# Altium PCB PCB1.PcbDoc (part 12 of 12)
Units mm, origin at the board's own origin, x right, y up, seen from the top; angles counter-clockwise.
Board outline 100 x 100 mm, 6 copper layers (Top Layer, Int1 (GND), Int2 (Sign), Int3 (Sign), Int4 (PWR), Bottom Layer), stack 1.538 mm thick; 614 components, 712 nets, 3014 pads, 1096 vias.
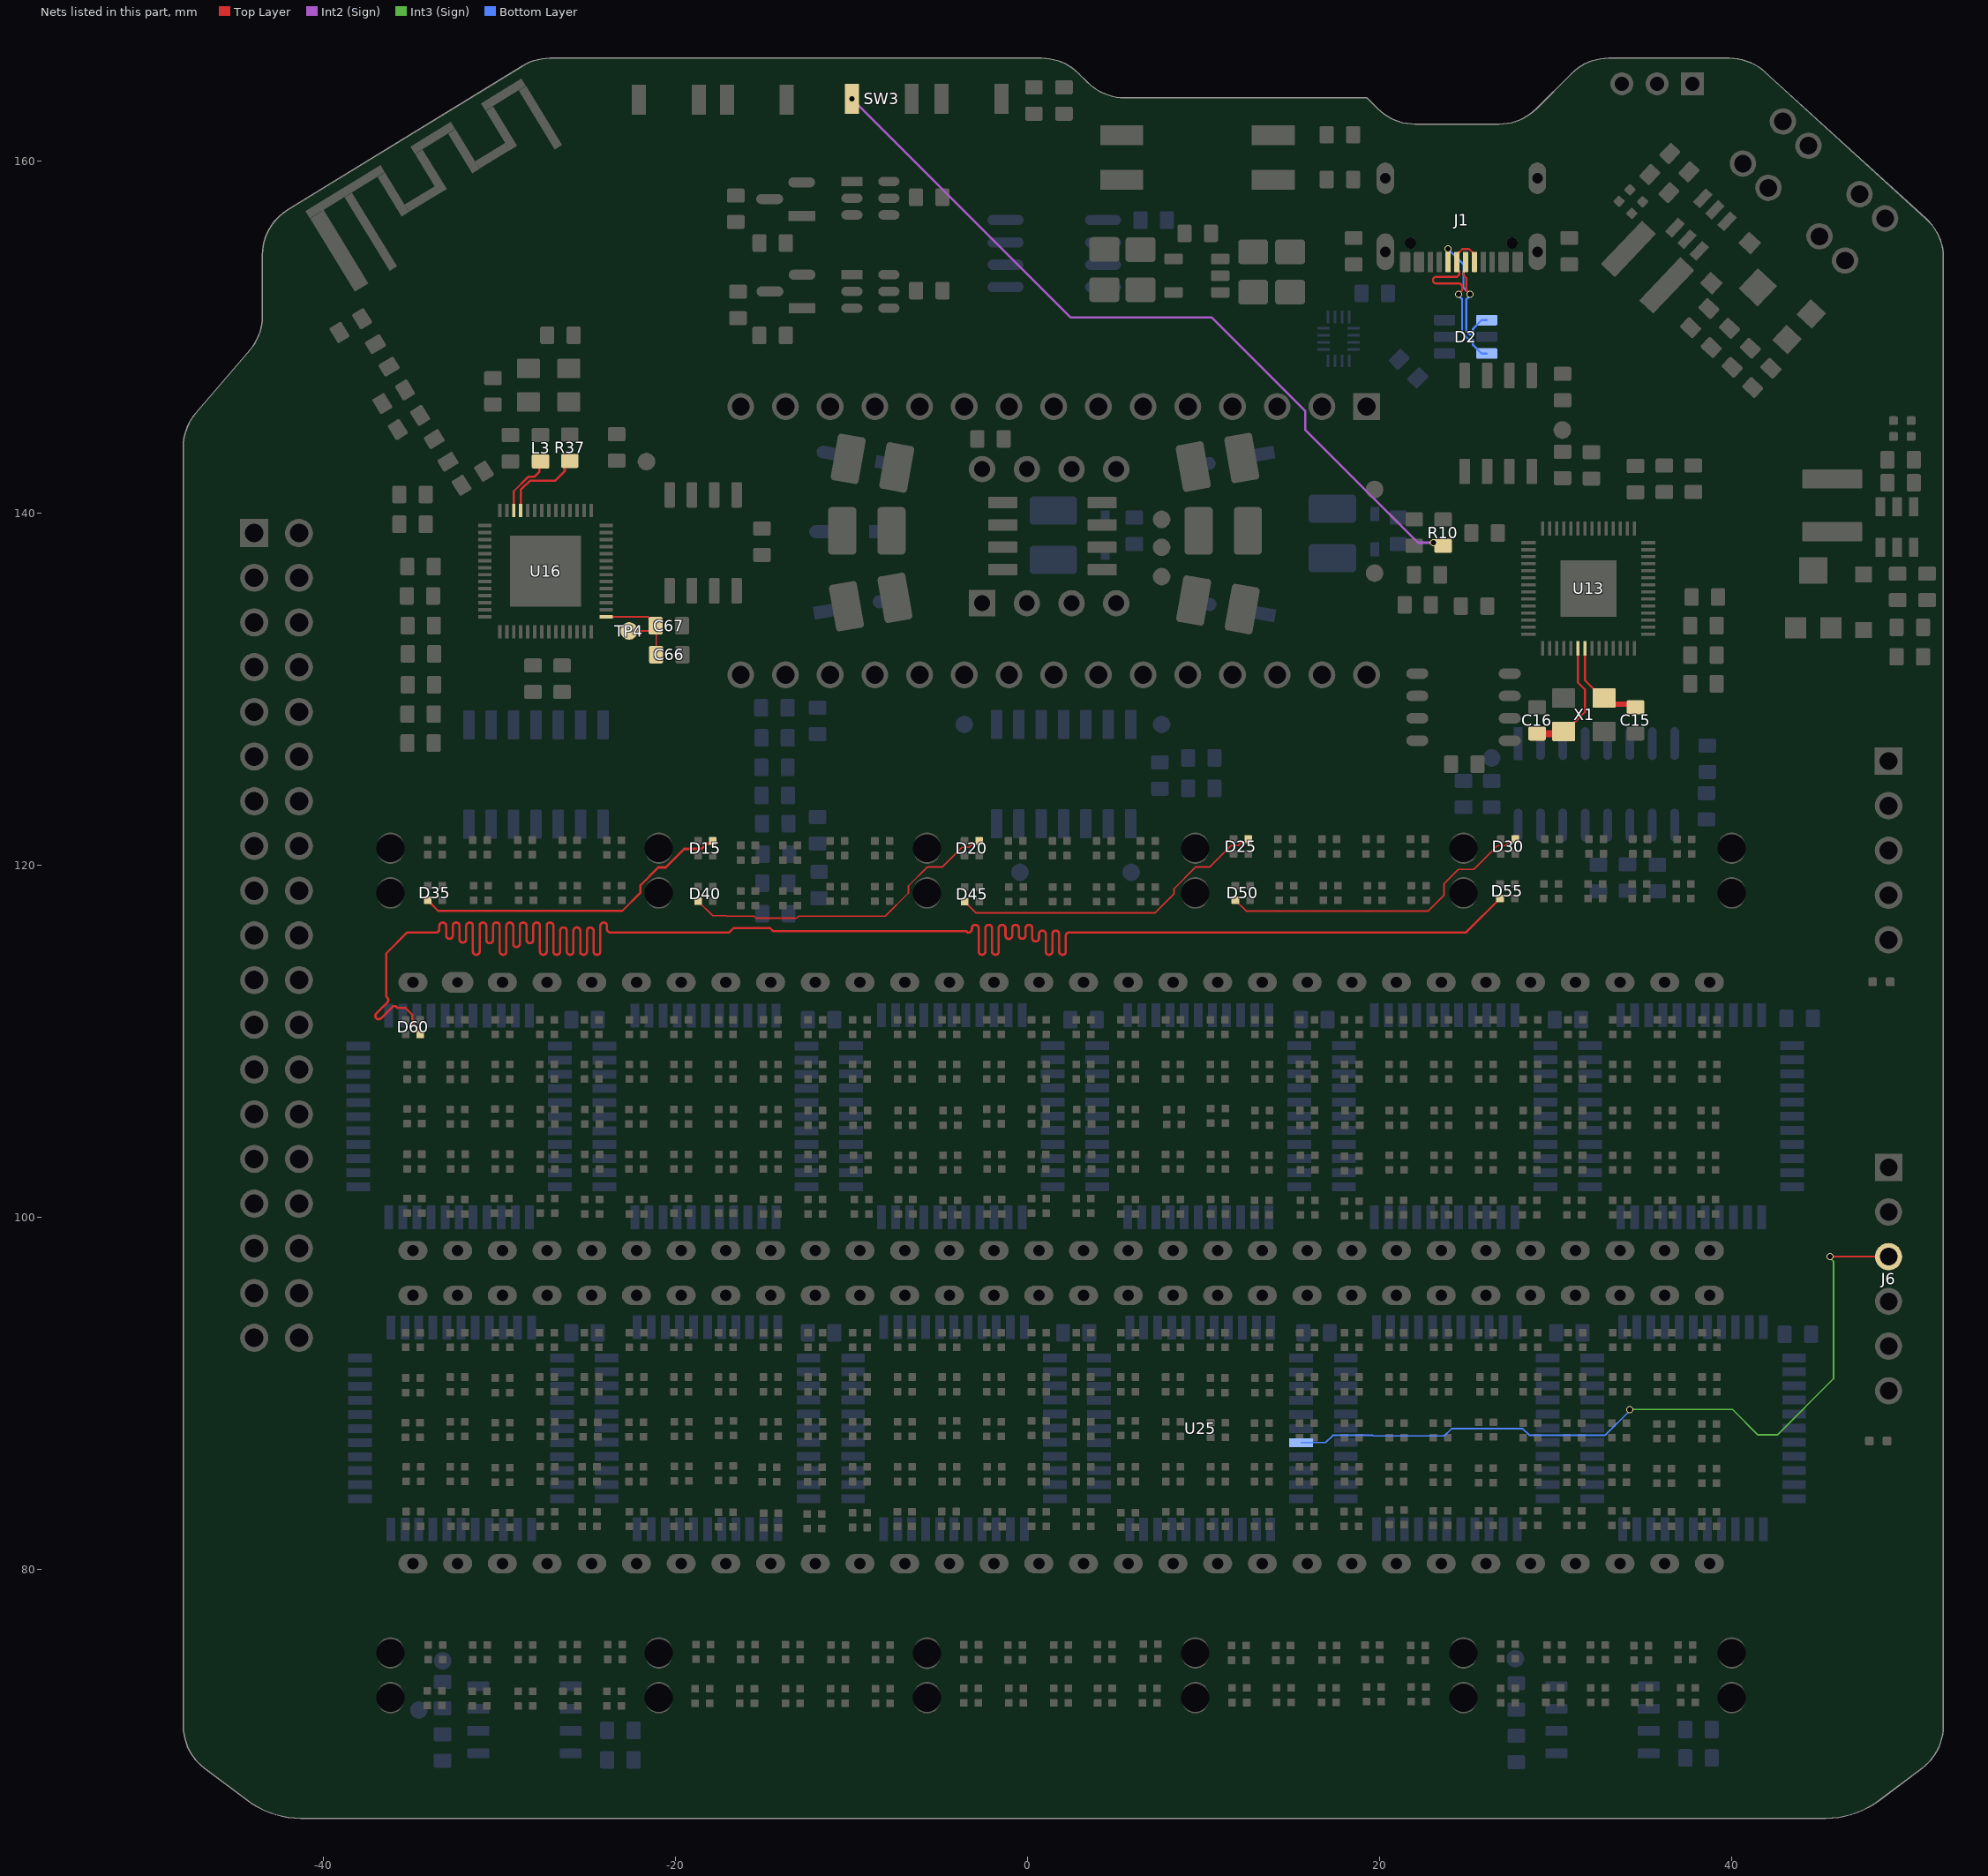
[diagram p15: the nets of this part, all layers, seen from the top]

## Via types
v1: diameter 0.4, hole 0.3, Top Layer to Bottom Layer, tented both sides, 1087 vias
v2: diameter 0.4, hole 0.3, Top Layer to Bottom Layer, 6 vias
v3: diameter 0.4, hole 0.3, Top Layer to Bottom Layer, tented top, 2 vias
v4: diameter 0.6, hole 0.5, Top Layer to Bottom Layer, 1 vias

## Nets (pads, with @x,y where several pads share a name; then routed paths per layer and width w, separated by ;. In a path a pad name is that pad's centre, name@x,y a point inside that pad or via, vN(x,y) a via of type N, cw(c..) or ccw(c..) an arc to the next point about the centre after c; other vN are vias at no path point) (continued)
SQUARE_WAV_1: J6.3 U25.7 | length 43.7
  Top Layer w0.09: v1(45.581,97.77) J6.3@48.905,97.77
  Int3 (Sign) w0.09: v1(34.202,89.089) 40.041,89.089 41.486,87.643 42.585,87.643 45.78,90.838 45.78,97.495 45.581,97.694 v1(45.581,97.77)
  Bottom Layer w0.09: U25.7@15.525,87.208 16.925,87.208 17.335,87.618 19.59,87.618 19.62,87.589 23.665,87.589 24.074,87.998 28.12,87.998 28.49,87.628 32.805,87.628 34.202,89.025 v1(34.202,89.089)
TOP1_RGB_OUT_8: D15.4 D35.1 | length 18.3
  Top Layer w0.127: D35.1@-34.1,118.021 -33.495,117.415 -23.039,117.415 -22.008,118.446 -22.008,118.87 -20.993,119.885 -20.573,119.885 -19.519,120.939 -18.547,120.939 -18.246,121.239 -18.059,121.239 D15.4@-17.907,121.391
TOP2_RGB_OUT_8: D20.4 D40.1 | length 18.5
  Top Layer w0.09: D40.1@-18.737,117.971 -17.908,117.141 -17.109,117.141 -17.083,117.115 -15.557,117.115 -15.445,117.003 -13.136,117.003 -13.024,117.115 -8.097,117.115 -6.781,118.431 -6.781,118.831 -5.708,119.904 -4.87,119.904 -3.744,121.031 -3.341,121.031 -3.119,121.253 -2.857,121.253 -2.82,121.29 -2.82,121.338 D20.4@-2.767,121.391
TOP3_RGB_OUT_8: D25.4 D45.1 | length 18.3
  Top Layer w0.09: D45.1@-3.584,117.949 -2.937,117.302 7.215,117.302 8.31,118.397 8.31,118.682 9.532,119.904 10.319,119.904 11.546,121.131 11.949,121.131 12.171,121.353 12.385,121.353 D25.4@12.523,121.491
TOP4_RGB_OUT_8: D30.4 D50.1 | length 18.2
  Top Layer w0.09: D50.1@11.793,118.021 12.406,117.408 22.75,117.408 23.641,118.299 23.641,118.953 24.465,119.777 25.338,119.777 26.692,121.131 27.132,121.131 27.354,121.353 27.568,121.353 D30.4@27.705,121.491
TOP5_RGB_OUT_8: D55.1 D60.4 | length 120.1
  Top Layer w0.127: D60.4@-34.517,110.401 -34.669,110.552 -34.669,110.74 -34.969,111.04 -34.969,111.522 -35.347,111.9 -35.805,111.9 -35.85,111.945 ccw(c-35.985,111.81) -36.119,111.945 -36.748,111.316 cw(c-36.883,111.451) -37.017,111.316 cw(c-36.883,111.451) -37.017,111.586 -36.389,112.214 ccw(c-36.523,112.349) -36.389,112.484 -36.45,112.545 -36.45,113.685 -36.45,114.99 -35.25,116.19 -33.685,116.19 -33.622,116.19 ccw(c-33.622,116.381) -33.431,116.381 -33.431,116.564 cw(c-33.241,116.564) -33.05,116.564 -33.05,116.021 ccw(c-32.86,116.021) -32.669,116.021 -32.669,116.564 cw(c-32.479,116.564) -32.288,116.564 -32.288,115.802 ccw(c-32.098,115.802) -31.907,115.802 -31.907,116.564 cw(c-31.717,116.564) -31.526,116.564 -31.526,115.111 ccw(c-31.336,115.111) -31.145,115.111 -31.145,116.564 cw(c-30.955,116.564) -30.764,116.564 -30.764,115.766 ccw(c-30.574,115.766) -30.383,115.766 -30.383,116.564 cw(c-30.193,116.564) -30.002,116.564 -30.002,115.111 ccw(c-29.812,115.111) -29.621,115.111 -29.621,116.564 cw(c-29.431,116.564) -29.24,116.564 -29.24,115.552 ccw(c-29.05,115.552) -28.859,115.552 -28.859,116.564 cw(c-28.669,116.564) -28.478,116.564 -28.478,115.766 ccw(c-28.288,115.766) -28.097,115.766 -28.097,116.564 cw(c-27.907,116.564) -27.716,116.564 -27.716,115.111 ccw(c-27.526,115.111) -27.335,115.111 -27.335,116.564 cw(c-27.145,116.564) -26.954,116.564 -26.954,115.111 ccw(c-26.764,115.111) -26.573,115.111 -26.573,116.285 cw(c-26.383,116.285) -26.192,116.285 -26.192,115.111 ccw(c-26.002,115.111) -25.811,115.111 -25.811,116.29 cw(c-25.621,116.29) -25.43,116.29 -25.43,115.111 ccw(c-25.24,115.111) -25.049,115.111 -25.049,116.285 cw(c-24.859,116.285) -24.668,116.285 -24.668,115.111 ccw(c-24.478,115.111) -24.287,115.111 -24.287,116.564 cw(c-24.097,116.564) -23.906,116.564 -23.906,116.381 ccw(c-23.716,116.381) -23.716,116.19 -23.039,116.19 -16.962,116.19 -16.713,116.44 -14.644,116.44 -14.472,116.268 -3.505,116.268 -3.427,116.19 -3.364,116.19 ccw(c-3.364,116.381) -3.173,116.381 -3.173,116.435 cw(c-2.983,116.435) -2.792,116.435 -2.792,115.111 ccw(c-2.602,115.111) -2.411,115.111 -2.411,116.435 cw(c-2.221,116.435) -2.03,116.435 -2.03,115.111 ccw(c-1.84,115.111) -1.649,115.111 -1.649,116.435 cw(c-1.459,116.435) -1.268,116.435 -1.268,116.009 ccw(c-1.078,116.009) -0.887,116.009 -0.887,116.435 cw(c-0.697,116.435) -0.506,116.435 -0.506,116.021 ccw(c-0.316,116.021) -0.125,116.021 -0.125,116.435 cw(c0.065,116.435) 0.256,116.435 0.256,115.867 ccw(c0.446,115.867) 0.637,115.867 0.637,116.104 cw(c0.827,116.104) 1.018,116.104 1.018,115.111 ccw(c1.208,115.111) 1.399,115.111 1.399,116.104 cw(c1.589,116.104) 1.78,116.104 1.78,115.111 ccw(c1.97,115.111) 2.161,115.111 2.161,116 cw(c2.351,116) 2.351,116.19 3.168,116.19 24.904,116.19 D55.1@26.833,118.12
USB_1_N: D2.3 J1.A7 J1.B7 | length 11.2
  Top Layer w0.116: v2(24.471,152.445) 24.471,152.449 24.677,152.655 24.677,152.824 24.677,152.882 ccw(c24.492,152.882) 24.492,153.066 23.201,153.066 cw(c23.201,153.251) 23.201,153.436 24.324,153.436 ccw(c24.324,153.621) 24.509,153.621 24.509,153.732 24.381,153.86 24.381,154.147 J1.A7@24.381,154.285 24.473,154.377 24.473,154.804 24.687,155.018 25.074,155.018 25.188,154.904 ; 25.188,154.902 25.381,154.71 J1.B7@25.381,154.285
  Bottom Layer w0.116: v2(24.471,152.445) 24.471,152.375 24.676,152.17 24.676,150.261 25.032,149.905 25.229,149.905 25.297,149.837 25.297,149.563 25.781,149.079 D2.3@26.081,149.079
USB_1_P: D2.1 J1.A6 J1.B6 | length 10.4
  Top Layer w0.116: v1(23.881,155.018) J1.B6@23.881,154.285 23.973,154.193 J1.B6@23.973,153.767 ; J1.A6@24.881,154.285 24.881,153.86 24.752,153.732 24.752,153.537 24.919,153.369 24.919,152.655 25.125,152.449 v2(25.125,152.445)
  Bottom Layer w0.116: v1(23.881,155.018) 24.752,154.147 24.752,152.818 v2(25.125,152.445) 25.125,152.375 24.92,152.17 24.92,150.361 25.133,150.148 25.229,150.148 25.297,150.216 25.297,150.495 25.781,150.979 D2.1@26.081,150.979
USB_BOOT_5: R10.2 SW3.1 | length 44.7
  Top Layer w0.127: v1(-9.996,163.555) SW3.1@-9.995,163.556 ; v1(23.057,138.335) 23.419,138.335 R10.2@23.598,138.156
  Int2 (Sign) w0.127: v1(-9.996,163.555) 2.42,151.139 10.445,151.139 15.758,145.826 15.758,144.752 22.175,138.335 v1(23.057,138.335)
VDD_SPI_6: C66.2 C67.2 TP4.1 U16.29 | length 6.3
  Top Layer w0.09: U16.29@-23.952,134.118 -21.578,134.118 -21.148,133.688 C67.2@-21.148,133.617 -21.448,133.318 TP4.1@-22.652,133.318 ; C67.2@-21.148,133.616 -21.106,133.574 -21.106,131.989 C66.2@-21.122,131.973
X_IN_5: C16.2 U13.20 X1.3 | length 6.4
  Top Layer w0.127: X1.3@30.326,127.492 X1.3@30.446,127.612 ; X1.3@31.02,127.908 31.02,128.086 31.657,128.723 31.657,129.998 31.257,130.398 U13.20@31.257,132.331
  Top Layer w0.4: C16.2@28.936,127.492 X1.3@30.326,127.492
X_OUT_5: C15.2 U13.21 X1.1 | length 5.1
  Top Layer w0.127: U13.21@31.657,132.331 31.657,130.516 32.159,130.014 32.159,129.998 32.646,129.512 X1.1@32.746,129.512 X1.1@33.103,129.154 ; C15.2@34.387,129.154 C15.2@34.395,129.146
  Top Layer w0.3: X1.1@33.103,129.154 C15.2@34.387,129.154
XTAL_6_N: R37.2 U16.53 | length 4.8
  Top Layer w0.127: U16.53@-28.804,140.17 -28.804,140.908 -28.806,140.909 -28.806,141.333 -28.272,141.866 -26.843,141.866 -26.31,142.399 -26.31,142.693 R37.2@-26.022,142.982
XTAL_6_P: L3.1 U16.54 | length 3.6
  Top Layer w0.127: U16.54@-29.204,140.17 -29.204,141.255 -28.366,142.093 -28.019,142.093 -27.745,142.367 -27.745,142.89 L3.1@-27.686,142.95
pads on no net: *.1 B1.6 B2.6 D405.1 J1.A8 J1.B8 J1.MH U3.4 U4.7 U4.8 U4.9 U4.10 U4.16 U5.9 U5.22 U5.23 U5.32 U5.44 U6.9 U6.22 U6.23 U6.32 U6.44 U7.9 U7.22 U7.23 U7.32 U7.44 U8.9 U8.22 U8.23 U8.32 U8.44 U9.9 U9.22 U9.23 U9.32 U9.44 U10.9 U10.22 U10.23 U10.32 U10.44 U11.9 U11.22 U11.23 U11.32 U11.44 U12.9 U12.22 U12.23 U12.32 U12.44 U16.21 U16.22 U17.7 U21.1 U21.2 U21.7 U21.8 U21.9 U21.10 U21.15 U21.16 U23.9 U23.22 U23.23 U23.32 U23.44 U24.9 U24.22 U24.23 U24.32 U24.44 U25.9 U25.22 U25.23 U25.32 U25.44 U26.9 U26.22 U26.23 U26.32 U26.44 U27.7 U31.2 U31.12

## Polygon pours and split planes (outlines as drawn)
REF on Top Layer "NONET_L01_P010" (solid, remove dead copper, shelved, pour order 10): -54.941,140.805 -38.79,140.805 -38.79,123.705 53.355,123.705 53.355,62.175 -54.941,62.175
REF on Top Layer "NONET_L01_P009" (hatched 45Degree grid 0.4 track 0.203, remove dead copper, shelved, pour order 9): -42.615,167.455 53.43,167.965 54.12,167.275 54.12,123.665 -38.79,123.665 -38.79,140.845 -48.615,140.845 -48.615,167.68
REF on Bottom Layer "NONET_L06_P072" (solid, remove dead copper, shelved, pour order 72): -55.425,168.06 56.7,168.06 56.7,64.125 57.75,63.075 56.565,61.89 -54.63,61.89
REF on Int1 (GND) (split plane): 229 vertices, not listed, extent -47.472,66.375 51.507,165.354

## Keep-outs
Keep-Out Layer:
  lines w0.013: -47.895,71.068 ccw(c-44.895,71.068) -46.695,68.668 -44.228,66.818 ccw(c-41.228,70.818) -41.228,65.818 -40.395,65.818 45.438,65.818 ccw(c45.438,70.818) 48.438,66.818 50.905,68.668 ccw(c49.105,71.068) 52.105,71.068 52.105,130.812 52.105,145.812 52.105,154.485 ccw(c49.105,154.485) 51.124,156.704 41.963,165.038 ccw(c39.945,162.818) 39.945,165.818 33.098,165.818 ccw(c33.098,162.818) 30.976,164.94 28.984,162.947 cw(c26.862,165.068) 26.862,162.068 22.098,162.068 cw(c22.098,165.068) 19.976,162.947 19.355,163.568 5.598,163.568 cw(c5.598,166.568) 3.476,164.447 2.984,164.94 ccw(c0.862,162.818) 0.862,165.818 -27.049,165.818 ccw(c-27.049,162.818) -28.616,165.376 -41.963,157.196 ccw(c-40.395,154.638) -43.395,154.638 -43.395,151.178 cw(c-46.395,151.178) -44.117,149.226 -47.173,145.661 ccw(c-44.895,143.709) -47.895,143.709 -47.895,71.068

## Other copper
Top Layer:
  pour cut-out: -43.465,141.708 cw(c-43.465,143.219) -44.976,143.219 cw(c-43.465,143.219) -43.465,144.73 cw(c-43.465,143.219) -41.954,143.219 cw(c-43.465,143.219)
  region net BUCK1_VIN_11: 47.34,142.59 47.46,142.47 47.46,142.215 48.244,142.215 48.284,142.175 49.194,142.175 49.173,141.285 49.173,141.27 48.255,141.27 48.076,141.448 47.48,141.448 47.378,141.346 44.004,141.346 44.004,142.584 44.01,142.59
  region net BUCK1_3v3: 34.457,141.128 34.457,138.756 34.878,138.756 34.878,138.335 35.025,138.335 35.025,141.129
  region net BUCK1_3v3: 34.38,140.945 37.815,140.945 37.815,141.455 34.38,141.455
Multi-Layer:
  pour cut-out: -42.945,158.01 -33.795,163.791 cw(c-31.084,163.577) -32.85,165.645 -29.04,166.38 -25.065,160.155 -39.12,151.367

## Silkscreen, mask and mechanical layers (free items; w line width, h text height)
Top Overlay:
  drawing of 433 lines, arcs and shapes, not listed
  text "R_RST" at -5.314,160.199 h1.5
  text "E_BOOT" at -17.775,160.17 h1.5
  text "R_BOOT" at -11.47,160.183 h1.5
  text "E_RST" at -22.483,160.155 h1.5
  text "5v" at 32.1,159.87 h1.2 r316.5
  text "3v3" at 31.56,159.27 h1.2 r316.5
  text "PWR" at 0.875,158.832 h1.5 r90
  text "NC" at -7.932,147.741 h1.5 r90
  text "A7" at -5.435,147.752 h1.5 r90
  text "A6" at -2.916,147.755 h1.5 r90
  text "A5" at -0.382,147.748 h1.5 r90
  text "GND" at -13.115,147.721 h1.5 r90
  text "RST" at -10.484,147.724 h1.5 r90
  text "A2" at 7.32,147.731 h1.5 r90
  text "A1" at 9.883,147.733 h1.5 r90
  text "A0" at 12.351,147.727 h1.5 r90
  text "D13" at 19.656,147.733 h1.5 r90
  text "A4" at 2.194,147.71 h1.5 r90
  text "A3" at 4.74,147.71 h1.5 r90
  text "NC" at 17.421,147.699 h1.5 r90
  text "5v" at -15.577,147.682 h1.5 r90
  text "AREF" at 14.846,147.541 h1.5 r90
  text "3v3" at 46.605,144.975 h1.2
  text "+1v1" at 30.833,144.248 h1.8
  text "5v" at 46.59,144.045 h1.2
  text "CH_VDD" at 19.628,141.925 h1.2
  text "-8v" at 8.135,140.094 h1.8 r90
  text "+8v" at 16.043,136.071 h1.8
  text "D0" at -13.084,127.521 h1.5 r90
  text "RST" at -10.59,127.535 h1.5 r90
  text "GND" at -8.059,127.539 h1.5 r90
  text "D2" at -5.45,127.533 h1.5 r90
  text "D3" at -2.904,127.532 h1.5 r90
  text "D12" at 19.634,127.52 h1.5 r90
  text "D1" at -15.418,127.517 h1.5 r90
  text "D4" at -0.335,127.515 h1.5 r90
  text "D5" at 2.188,127.506 h1.5 r90
  text "D6" at 4.717,127.504 h1.5 r90
  text "D11" at 17.486,127.508 h1.5 r90
  text "D7" at 7.191,127.491 h1.5 r90
  text "D8" at 9.746,127.479 h1.5 r90
  text "D9" at 12.335,127.473 h1.5 r90
  text "D10" at 14.85,127.493 h1.5 r90
  text "+vcc" at 44.009,125.182 h1.5
  text "PROBE" at 43.959,122.617 h1
  text "GND" at 44.184,120.118 h1
  text "Tx" at 44.831,117.635 h1
  text "Rx" at 44.884,115.167 h1
  text "+vcc" at 44.105,102.133 h1.5
  text "GND" at 44.364,99.7 h1
  text "Swave" at 43.69,96.933 h1
  text "STwave" at 43.495,94.629 h1
  text "3Wave" at 43.615,92.08 h1
  text "5Wave" at 43.669,89.406 h1
Bottom Overlay:
  text "A" at -31.495,114.458 h1.8
  text "I" at -3.545,114.358 h1.8
  text "L" at 10.455,114.358 h1.8
  text "C" at 24.455,114.358 h1.8
  text "D" at 38.455,114.358 h1.8
  text "B" at -17.513,114.308 h1.8
  text "E" at -31.695,77.408 h1.8
  text "J" at -3.745,77.308 h1.8
  text "K" at 10.255,77.308 h1.8
  text "G" at 24.255,77.308 h1.8
  text "H" at 38.255,77.308 h1.8
  text "F" at -17.713,77.258 h1.8
  text "ISENSE - 1" at 35.351,67.362 h0.8
  text "ISENSE - 2" at -25.095,67.058 h0.8
Top Solder:
  region: -26.09,148.752 -26.09,148.755 -26.084,148.755 -26.084,148.752 -26.087,148.752
  region: -26.071,149.247 -26.071,149.241 -26.078,149.241 -26.078,149.25 -26.075,149.25 -26.075,149.247
  region: -26.075,149.031 -26.075,149.034 -26.068,149.034 -26.068,149.025 -26.071,149.025 -26.071,149.028 -26.075,149.028
  region: -26.09,149.111 -26.087,149.111 -26.087,149.107 -26.09,149.107
  region: -26.084,148.723 -26.087,148.723 -26.087,148.726 -26.084,148.726
  region: -26.087,149.295 -26.087,149.298 -26.084,149.298 -26.084,149.295
  region: -26.068,148.85 -26.068,148.847 -26.075,148.847 -26.075,148.85 -26.071,148.85
  region: -26.078,149.184 -26.081,149.184 -26.081,149.187 -26.078,149.187
  region: -26.075,149.282 -26.075,149.276 -26.078,149.276 -26.078,149.282
  region: -26.071,148.678 -26.071,148.675 -26.078,148.675 -26.078,148.678 -26.081,148.678 -26.081,148.682 -26.071,148.682
  region: -26.065,149.171 -26.065,149.165 -26.075,149.165 -26.075,149.171 -26.068,149.171
  region: -26.081,148.818 -26.081,148.821 -26.075,148.821 -26.075,148.818 -26.078,148.818
  region: -26.084,148.958 -26.081,148.958 -26.081,148.961 -26.078,148.961 -26.078,148.958 -26.075,148.958 -26.075,148.949 -26.081,148.949 -26.081,148.952 -26.087,148.952 -26.087,148.958
  region: -26.075,148.91 -26.071,148.91 -26.071,148.907 -26.075,148.907 -26.075,148.895 -26.078,148.895 -26.078,148.898 -26.081,148.898 -26.081,148.91 -26.078,148.91 -26.078,148.914 -26.075,148.914
Top Courtyard:
  lines w0.013: -47.887,71.056 ccw(c-44.887,71.056) -46.687,68.656 ; -47.887,71.056 ccw(c-44.887,71.056) -46.687,68.656 ; -47.887,71.056 -47.887,143.697 ; -47.887,71.056 -47.887,143.697 ; -47.887,143.697 cw(c-44.887,143.697) -47.165,145.649 ; -47.887,143.697 cw(c-44.887,143.697) -47.165,145.649 ; -47.165,145.649 -44.109,149.214 ; -47.165,145.649 -44.109,149.214 ; -46.687,68.656 -44.22,66.806 ; -46.687,68.656 -44.22,66.806 ; -44.22,66.806 ccw(c-41.22,70.806) -41.22,65.806 ; -44.22,66.806 ccw(c-41.22,70.806) -41.22,65.806 ; -44.109,149.214 ccw(c-46.387,151.166) -43.387,151.166 ; -44.109,149.214 ccw(c-46.387,151.166) -43.387,151.166 ; -43.387,151.166 -43.387,154.626 ; -43.387,151.166 -43.387,154.626 ; -43.387,154.626 cw(c-40.387,154.626) -41.955,157.184 ; -43.387,154.626 cw(c-40.387,154.626) -41.955,157.184 ; -41.955,157.184 -28.609,165.364 ; -41.955,157.184 -28.609,165.364 ; -41.22,65.806 -40.387,65.806 ; -41.22,65.806 -40.387,65.806 ; -40.387,65.806 45.446,65.806 ; -40.387,65.806 45.446,65.806 ; -28.609,165.364 cw(c-27.041,162.806) -27.041,165.806 ; -28.609,165.364 cw(c-27.041,162.806) -27.041,165.806 ; -27.041,165.806 0.87,165.806 ; -27.041,165.806 0.87,165.806 ; 0.87,165.806 cw(c0.87,162.806) 2.992,164.928 ; 0.87,165.806 cw(c0.87,162.806) 2.992,164.928 ; 2.992,164.928 3.484,164.435 ; 2.992,164.928 3.484,164.435 ; 3.484,164.435 ccw(c5.606,166.556) 5.606,163.556 ; 3.484,164.435 ccw(c5.606,166.556) 5.606,163.556 ; 5.606,163.556 19.363,163.556 ; 5.606,163.556 19.363,163.556 ; 19.363,163.556 19.984,162.935 ; 19.363,163.556 19.984,162.935 ; 19.984,162.935 ccw(c22.106,165.056) 22.106,162.056 ; 19.984,162.935 ccw(c22.106,165.056) 22.106,162.056 ; 22.106,162.056 26.87,162.056 ; 22.106,162.056 26.87,162.056 ; 26.87,162.056 ccw(c26.87,165.056) 28.992,162.935 ; 26.87,162.056 ccw(c26.87,165.056) 28.992,162.935 ; 28.992,162.935 30.984,164.928 ; 28.992,162.935 30.984,164.928 ; 30.984,164.928 cw(c33.106,162.806) 33.106,165.806 ; 30.984,164.928 cw(c33.106,162.806) 33.106,165.806 ; 33.106,165.806 39.953,165.806 ; 33.106,165.806 39.953,165.806 ; 39.952,165.806 cw(c39.952,162.806) 41.971,165.025 ; 39.952,165.806 cw(c39.952,162.806) 41.971,165.025 ; 41.971,165.025 51.132,156.692 ; 41.971,165.025 51.132,156.692 ; 45.446,65.806 ccw(c45.446,70.806) 48.446,66.806 ; 45.446,65.806 ccw(c45.446,70.806) 48.446,66.806 ; 48.446,66.806 50.913,68.656 ; 48.446,66.806 50.913,68.656 ; 50.913,68.656 ccw(c49.113,71.056) 52.113,71.056 ; 50.913,68.656 ccw(c49.113,71.056) 52.113,71.056 ; 51.132,156.692 cw(c49.113,154.473) 52.113,154.473 ; 51.132,156.692 cw(c49.113,154.473) 52.113,154.473 ; 52.113,71.056 52.113,130.8 ; 52.113,71.056 52.113,130.8 ; 52.113,130.8 52.113,145.8 ; 52.113,130.8 52.113,145.8 ; 52.113,145.8 52.113,154.473 ; 52.113,145.8 52.113,154.473
Top Assembly:
  circle w0.013: c48.905,125.927 r0.4
  circle w0.013: c48.905,92.687 r0.4
  circle w0.013: c48.905,102.847 r0.4
  circle w0.013: c48.905,100.307 r0.4
  circle w0.013: c48.905,97.767 r0.4
  circle w0.013: c48.905,95.227 r0.4
  circle w0.013: c48.905,123.387 r0.4
  circle w0.013: c48.905,120.847 r0.4
  circle w0.013: c48.905,118.307 r0.4
  circle w0.013: c48.905,115.767 r0.4
  lines w0.013: 2.53,65.806 2.53,68.806 ; -38.745,68.806 43.805,68.806 43.805,123.416 -38.745,123.416 -38.745,68.806 ; -38.745,69.06 ccw(c-38.491,69.06) -38.491,68.806 -35.57,68.806 -35.57,70.076 -37.475,71.981 -37.475,74.521 -38.745,74.521 -38.745,69.06 ; -38.745,117.701 -37.475,117.701 -37.475,120.241 -35.57,122.146 -35.57,123.416 -38.491,123.416 ccw(c-38.491,123.162) -38.745,123.162 -38.745,117.701 ; 40.63,68.806 43.551,68.806 ccw(c43.551,69.06) 43.805,69.06 43.805,74.521 42.535,74.521 42.535,71.981 40.63,70.076 40.63,68.806 ; 40.63,122.146 42.535,120.241 42.535,117.701 43.805,117.701 43.805,123.162 ccw(c43.551,123.162) 43.551,123.416 40.63,123.416 40.63,122.146
Mechanical 7:
  circle w0.127: c-43.465,143.219 r1.511
  lines w0.013: -47.887,87.726 -47.887,107.806 ; -47.887,110.806 -47.887,130.886 ; 52.113,99.266 52.113,119.346 ; 50.305,87.727 50.305,107.807 52.105,107.807 52.105,87.727 50.305,87.727 ; 50.305,110.807 50.305,130.887 52.105,130.887 52.105,110.807 50.305,110.807

## Text inside footprints (layer, text, board x,y; h text height)
D1: Mechanical 13 "+" at 0.956,162.141 h0.5 r270
U4: Bottom Overlay "*" at 19.36,150.949 h0.3
U16: Top Overlay "*" at -31.873,139.477 h0.3